# Altium PCB CH32V103R-R0-1v3.PcbDoc
Units mil, origin at the board's own origin, x right, y up, seen from the top; angles counter-clockwise.
Board outline 1801.31 x 2217.7 mil, 2 copper layers (Top Layer, Bottom Layer); 39 components, 69 nets, 227 pads, 127 vias.
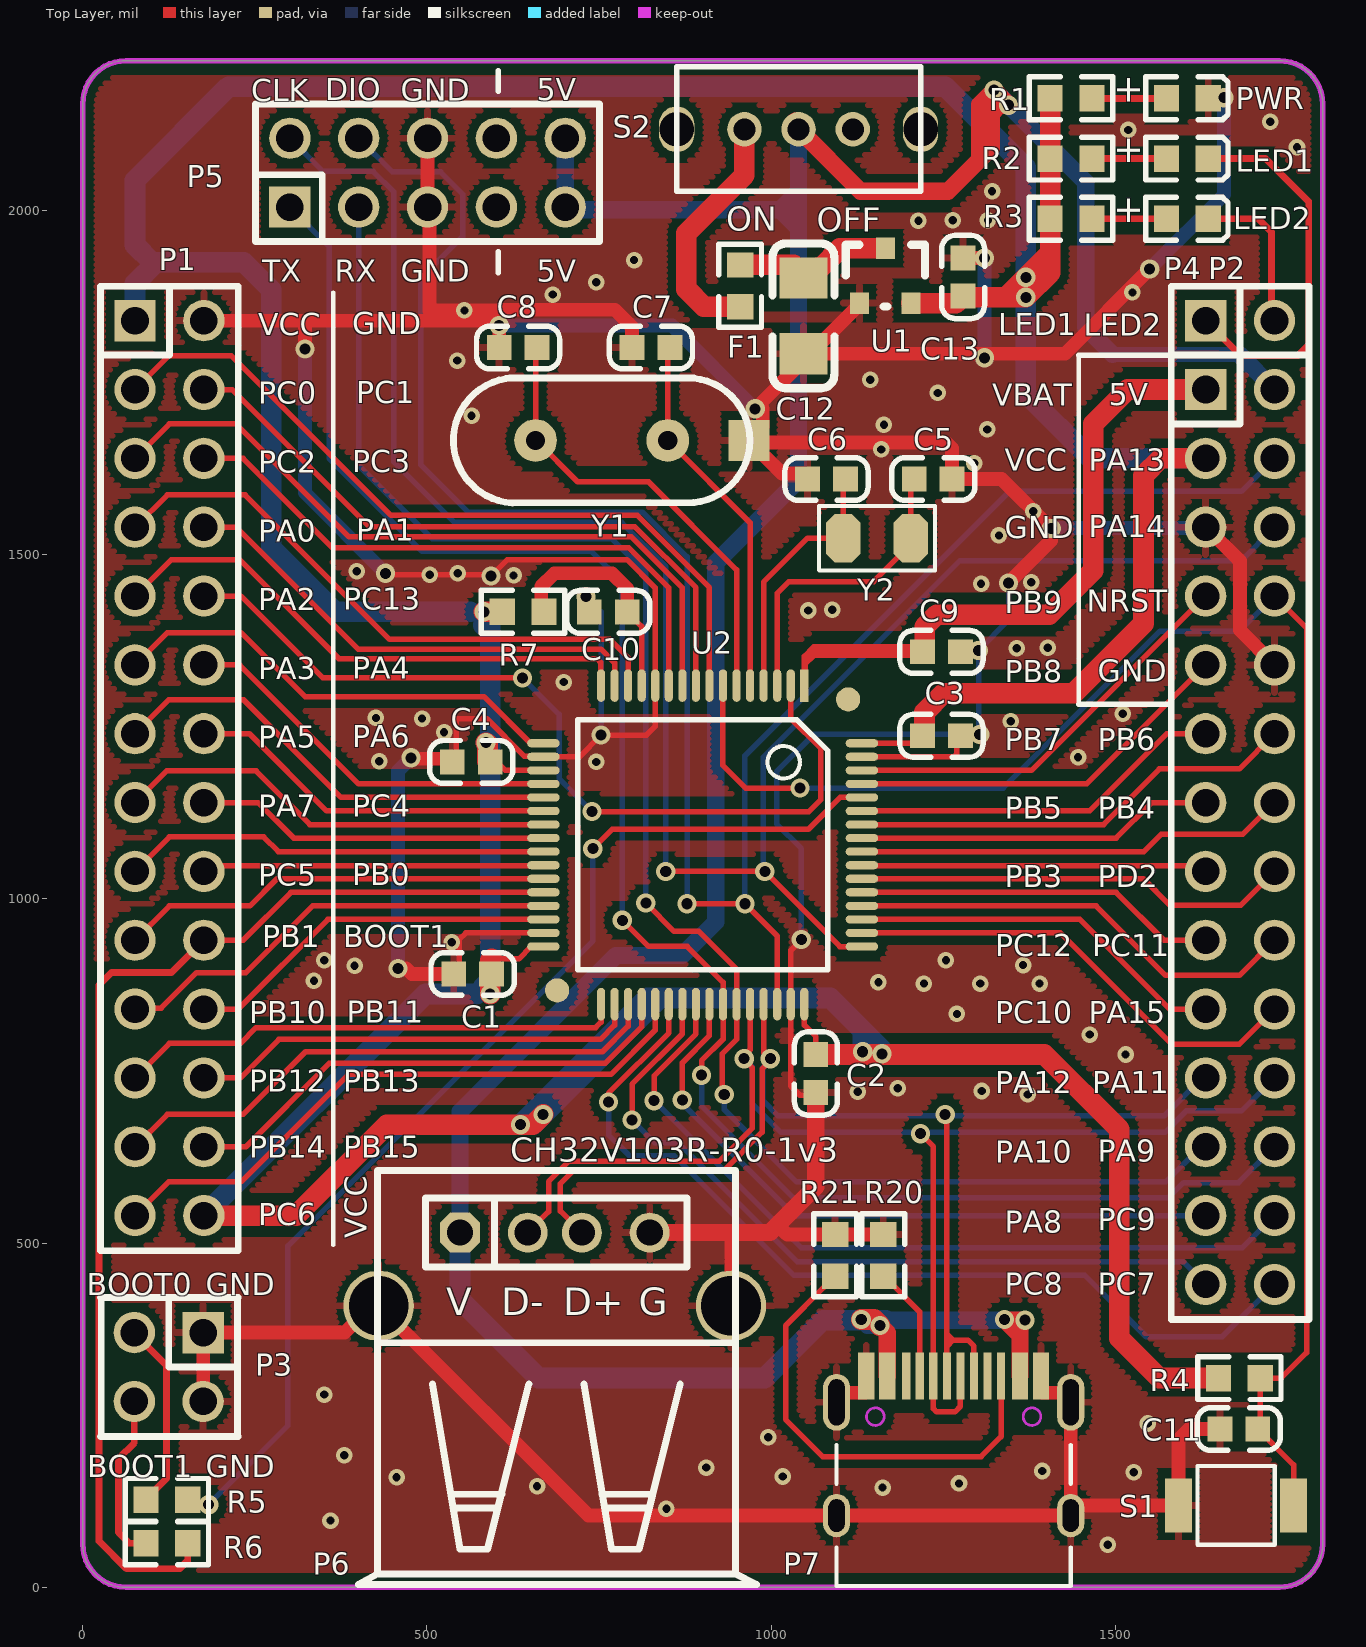
[diagram p0: Top Layer view]
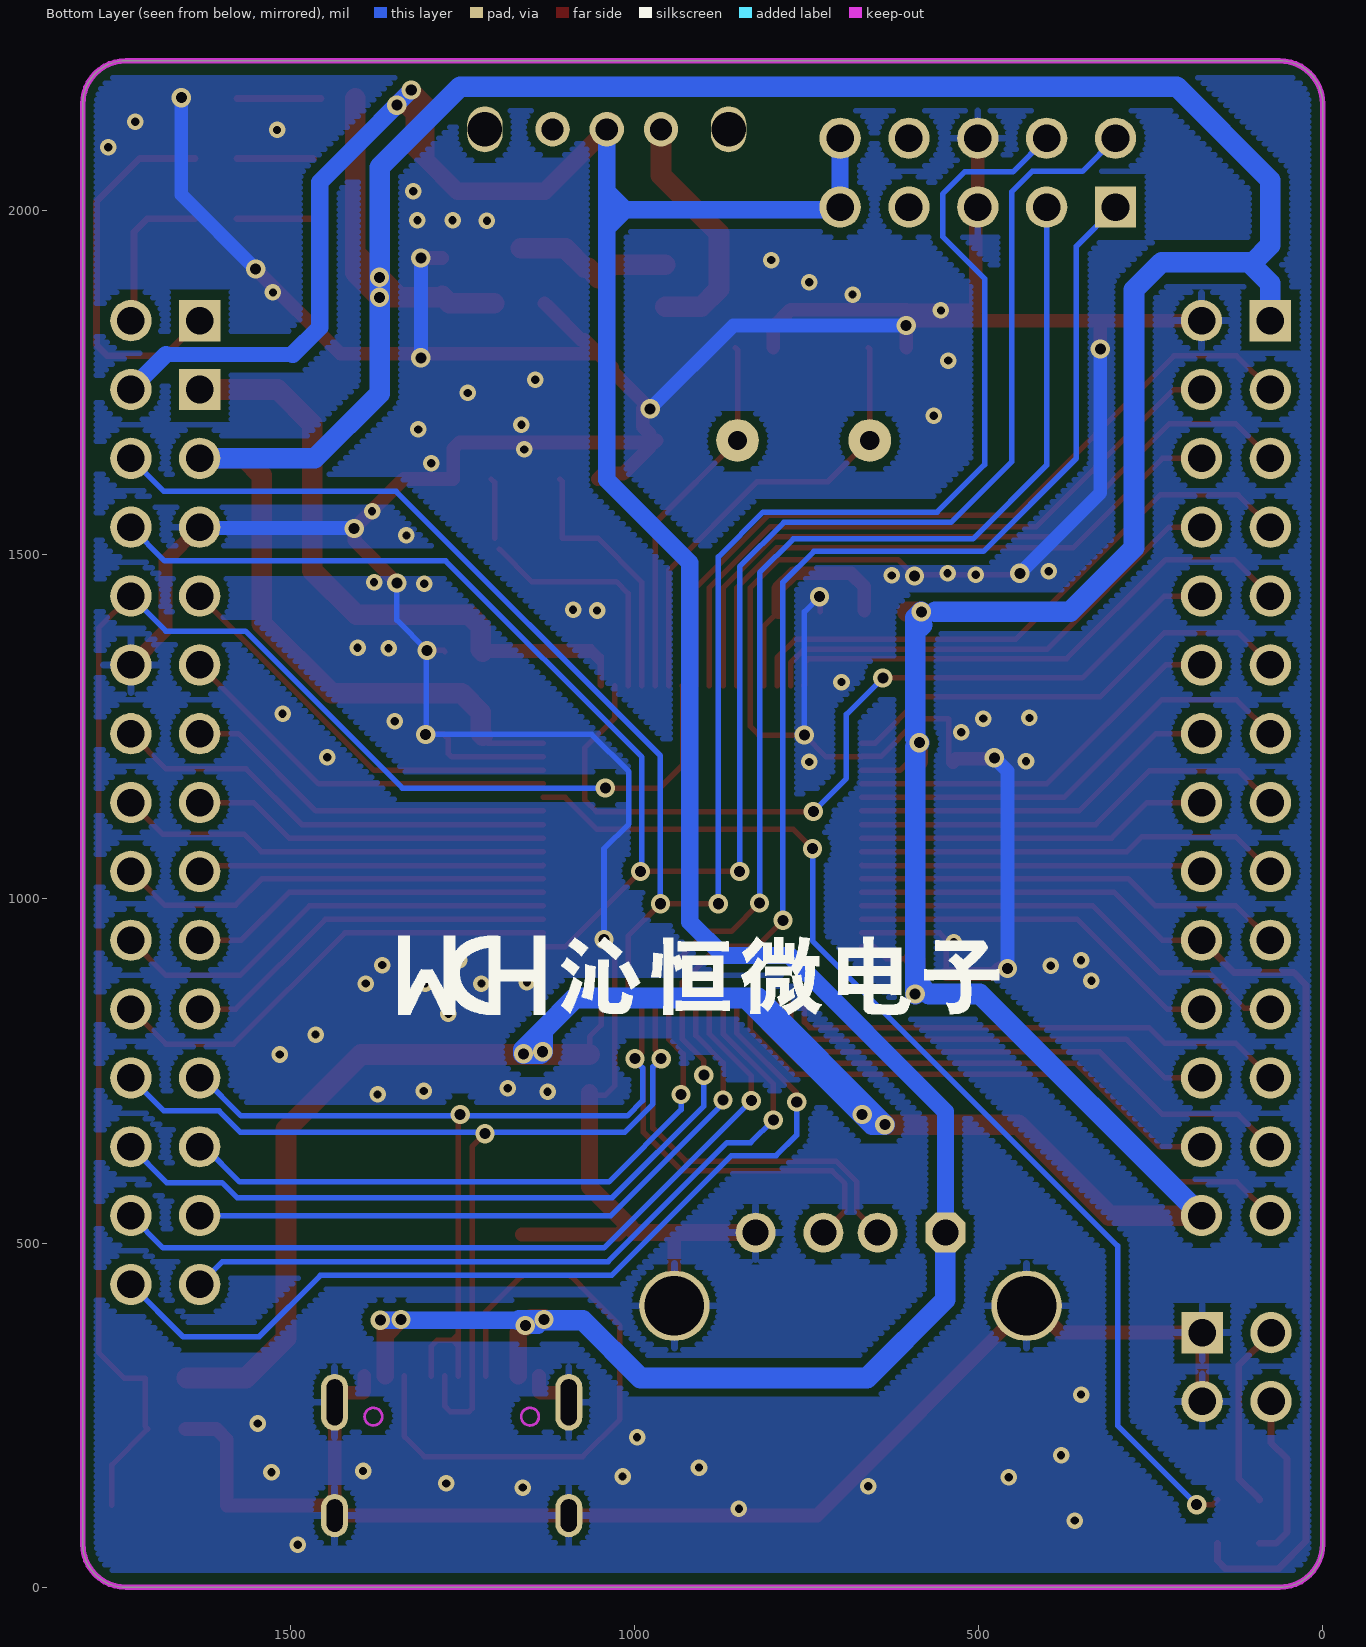
[diagram p1: Bottom Layer view, seen from below]

## Layer stack, top to bottom
Top Solder: solder mask 0.4, Solder Resist, Dk 3.5
Top Layer: signal copper 1.4
Dielectric 1: dielectric 12.6, FR-4, Dk 4.8
Bottom Layer: signal copper 1.4
Bottom Solder: solder mask 0.4, Solder Resist, Dk 3.5

## Board outline
0,62.99 0,2154.71 cw(c62.99,2154.71) 62.99,2217.7 1738.32,2217.7 cw(c1738.32,2154.71) 1801.31,2154.71 1801.31,62.99 cw(c1738.32,62.99) 1738.32,0 62.99,0 cw(c62.99,62.99)

## Design rules (kind name [scope] priority, off if disabled: settings)
Clearance Clearance_1 [InPolygon] p1: gap=12 ignorepadtopadclearanceinfootprint=FALSE
Clearance [All] p2: gap=6 ignorepadtopadclearanceinfootprint=FALSE
ComponentClearance [All] p1 off: gap=10 collisioncheckmode=3 verticalgap=10 showdistances=FALSE
MinimumSolderMaskSliver [All] p1 off: minsoldermaskwidth=10
PolygonConnect PolygonConnect_1 [IsVia] p1: connectstyle=Direct reliefconductorwidth=10 reliefentries=4 polygonreliefangle="90 Angle" airgapwidth=10
PolygonConnect [All] p2: connectstyle=Relief reliefconductorwidth=10 reliefentries=4 polygonreliefangle="90 Angle" airgapwidth=10
RoutingVias [All] p1: holewidth=28 width=50 viastyle="Through Hole" minholewidth=12 minwidth=24 maxholewidth=16 maxwidth=28
SilkToSilkClearance [All] p1 off: silktosilkclearance=10
SilkToSolderMaskClearance [IsPad] p1 off: minsilkscreentomaskgap=10 clearancetoexposedcopper=TRUE
SolderMaskExpansion [All] p1: expansion=4 istentingtop=FALSE
Width [All] p1: maxlimit=50 minlimit=8 preferedwidth=10
26 further rules are at their usual default settings.

## Components (designator, comment, footprint, x,y, rotation, side; value= is the part's Value field where it differs from the comment)
C1 "0.1uF" 0603_C 539,891 r0 top value=15pF
C2 "0.1uF" 0603_C 1065,719 r90 top value=15pF
C3 "0.1uF" 0603_C 1274.98,1237 r180 top value=15pF
C4 "0.1uF" 0603_C 537,1199 r0 top value=15pF
C5 "12pF" 0603_C 1208,1610 r0 top
C6 "12pF" 0603_C 1108,1610 r180 top
C7 "22pF" 0603_C 798,1801 r0 top
C8 "22pF" 0603_C 605,1801 r0 top
C9 "0.1uF" 0603_C 1220,1359 r0 top value=15pF
C10 "0.1uF" 0603_C 791,1417 r180 top value=15pF
C11 "0.1uF" 0603_C 1652,230 r0 top
C12 "10uF" 3216_C 1047,1902 r90 top
C13 "2.2uF" 0603_C 1279,1876 r90 top
F1 "500mA" 0603 955,1860.37 r90 top
LED1 "LED1   blue" 0603+ 1574.37,2075.5 r0 top
LED2 "LED2  blue" 0603+ 1574.37,1988 r0 top
P1 "HEADER 14x2" IDC28-2.54mm 76,1840 r0 top
P2 "HEADER 14x2" IDC28-2.54mm 1631.31,1740 r0 top
P3 "Header 2X2" IDC4-2.54mm 175,370 r270 top
P4 "2HEAD" SIP2-2.54mm 1631.31,1840 r90 top
P5 "HEADER 5x2" IDC10-2.54mm 701,2005 r90 top
P6 "USB_A" USBAF 548.11,515.3 r0 top
P7 "TYPE-C" TYPE-C-Receptacle-2.0 1265.21,306.99 r0 top
PWR "POWER  red" 0603+ 1574.37,2163 r0 top
R1 "1K" 0603 1466,2163 r180 top
R2 "1K" 0603 1405.37,2075.5 r0 top
R3 "1K" 0603 1405.37,1988 r0 top
R4 "10K" 0603 1710.63,304 r180 top
R5 "10K" 0603 152.63,127 r180 top
R6 "10K" 0603 152.63,64 r180 top
R7 "0Ω" 0603 609.37,1417 r0 top value=10K
R20 "NC(5.1K)" 0603 1163,452 r90 top
R21 "NC(5.1K)" 0603 1093,452 r90 top
S1 "KEY" 贴片按键 1759,119 r180 top
S2 "SW" KEY2 1197.48,2118 r180 top
U1 "6219P33M" SOT-23 1128.6,1865.47 r0 top
U2 "CH32V103R" LQFP64M_10X10 1048.29,1309.91 r180 top
Y1 "8M" XT_AT49 657.87,1666 r270 top
Y2 "32.768k" FC-135 1203,1524 r180 top

## Footprints (in the part's own frame and the unit in brackets; to place one, negate y for a bottom-side part, rotate by r counter-clockwise, add the part's x,y. Pads: shape width x height; smd on the part's side, far side on the other; paste and mask are expansions set on the pad)
0603 [mm]
  rect 0.93x0.98 smd: 1(0,0) 2(1.54,0)
  silkscreen extent -0.76,-0.79 2.3,0.79
0603+ [mm]
  rect 0.93x0.98 smd: 1(0,0) 2(1.54,0)
  silkscreen extent -0.76,-0.79 2.27,0.79
0603_C [mil]
  rect 36x36 smd: 1(0,0) 2(55,0)
  silkscreen extent -33,-31 88,31
3216_C [mil]
  rect 60x70 smd: 1(0,0) 2(-110,0)
  silkscreen extent -160,-45 50,45
FC-135 [mil]
  oct 50x70 smd: 1(0,0) 2(98.43,0)
  silkscreen extent -35,-47 133,47
IDC4-2.54mm [mil]
  rect 60x60 hole 40: 1(0,0)
  round 60 hole 40: 2(100,0) 3(0,-100) 4(100,-100)
  silkscreen extent -51,-149 151,51
IDC10-2.54mm [mil]
  rect 60x60 hole 40: 1(0,400)
  round 60 hole 40: 2(100,400) 3(0,300) 4(100,300) 5(0,200) 6(100,200) 7(0,100) 8(100,100) 9(0,0) 10(100,0)
  silkscreen extent -50,-50 150,450
IDC28-2.54mm [mil]
  rect 60x60 hole 40: 1(0,0)
  round 60 hole 40: 2(100,0) 3(0,-100) 4(100,-100) 5(0,-200) 6(100,-200) 7(0,-300) 8(100,-300) 9(0,-400) 10(100,-400) 11(0,-500) 12(100,-500) 13(0,-600) 14(100,-600) 15(0,-700) 16(100,-700) 17(0,-800) 18(100,-800) 19(0,-900) 20(100,-900) 21(0,-1000) 22(100,-1000) 23(0,-1100) 24(100,-1100) 25(0,-1200) 26(100,-1200) 27(0,-1300) 28(100,-1300)
  silkscreen extent -50,-1351 150,50
KEY2 [mm]
  oval 1.3x1.7 hole 1.27: 0(-0.5,0) 0(8.5,0)
  round 1.27 hole 0.813: 1(4,0) 2(2,0) 3(6,0)
  silkscreen extent -0.51,-2.31 8.5,2.29
LQFP64M_10X10 [mm]
  round 0.889 smd: 0(-1.619,0.508) 0(9.119,11.246)
  rect 0.3x1.2 smd: 1(0,0)
  oval 0.3x1.2 smd: 2(0.5,0) 3(1,0) 4(1.5,0) 5(2,0) 6(2.5,0) 7(3,0) 8(3.5,0) 9(4,0) 10(4.5,0) 11(5,0) 12(5.5,0) 13(6,0) 14(6.5,0) 15(7,0) 16(7.5,0) 33(7.5,11.754) 34(7,11.754) 35(6.5,11.754) 36(6,11.754) 37(5.5,11.754) 38(5,11.754) 39(4.5,11.754) 40(4,11.754) 41(3.5,11.754) 42(3,11.754) 43(2.5,11.754) 44(2,11.754) 45(1.5,11.754) 46(1,11.754) 47(0.5,11.754) 48(0,11.754)
  oval 1.2x0.3 smd: 17(9.627,2.127) 18(9.627,2.627) 19(9.627,3.127) 20(9.627,3.627) 21(9.627,4.127) 22(9.627,4.627) 23(9.627,5.127) 24(9.627,5.627) 25(9.627,6.127) 26(9.627,6.627) 27(9.627,7.127) 28(9.627,7.627) 29(9.627,8.127) 30(9.627,8.627) 31(9.627,9.127) 32(9.627,9.627) 49(-2.127,9.627) 50(-2.127,9.127) 51(-2.127,8.627) 52(-2.127,8.127) 53(-2.127,7.627) 54(-2.127,7.127) 55(-2.127,6.627) 56(-2.127,6.127) 57(-2.127,5.627) 58(-2.127,5.127) 59(-2.127,4.627) 60(-2.127,4.127) 61(-2.127,3.627) 62(-2.127,3.127) 63(-2.127,2.627) 64(-2.127,2.127)
  silkscreen extent -0.86,1.26 8.37,10.49
SIP2-2.54mm [mil]
  rect 60x60 hole 40: 1(0,0)
  round 60 hole 40: 2(0,-100)
  silkscreen extent -50,-150 50,50
SOT-23 [mm]
  rect 0.7x0.8 smd: 1(0,0) 2(1.9,0) 3(0.95,2.02)
  silkscreen extent -0.51,-0.13 2.41,2.16
TYPE-C-Receptacle-2.0 [mm]
  oval 1x1.6 hole 0.6 slot 1.2 at 90 deg: 0(-4.32,-5.15) 0(4.32,-5.15)
  oval 1x2.1 hole 0.6 slot 1.7 at 90 deg: 0(-4.32,-0.97) 0(4.32,-0.97)
  rect 0.6x1.75 smd: A1(-3.225,0) A4(-2.45,0) B1(3.225,0) B4(2.45,0)
  rect 0.3x1.75 smd: A5(-1.25,0) A6(-0.25,0) A7(0.25,0) A8(1.25,0) B5(1.75,0) B6(0.75,0) B7(-0.75,0) B8(-1.75,0)
  Keep-Out Layer circle w0.1: c2.89,-1.5 r0.325
  Keep-Out Layer circle w0.1: c-2.89,-1.5 r0.325
  silkscreen extent -4.32,-7.75 4.32,-2.55
USBAF [mm]
  round 2.6 hole 2.2: 0(-3,-2.7) 0(10,-2.7)
  oct 1.473x1.473 hole 0.965: 1(0,0)
  round 1.473 hole 0.965: 2(2.5,0) 3(4.5,0) 4(7,0)
  silkscreen extent -3.75,-12.99 10.95,2.29
XT_AT49 [mil]
  rect 60x60 smd: 0(0,310)
  round 62 hole 28: 1(0,0) 2(0,192.13)
  silkscreen extent -91,-119 91,311
贴片按键 [mm]
  rect 1x2 smd: 1(0,0) 3(4.242,0)
  silkscreen extent 0.69,-1.45 3.55,1.45

## Part data
C1 C2 C3 C4 C5 C6 C7 C8 C9 C10 C11: library part Cap, "Capacitor", LatestRevisionDate=17-Jul-2002, LatestRevisionNote="Re-released for DXP Platform.", PackageReference=RAD-0.3, Published=8-Jun-2000, Publisher="Altium Limited"
C12 C13: library part CAP, "Capacitor"
F1: library part FUSE1, "Fuse"
LED1 LED2 PWR: library part LED0, "Typical INFRARED GaAs LED", LatestRevisionDate=08-Jul-2005, LatestRevisionNote="Mech Layer 1 removed.", PackageReference=LED-0, Published=8-Jun-2000, Publisher="Altium Limited"
P1 P2: "Header, 14-Pin, Dual row"
P3: "Header, 2-Pin, Dual row", LatestRevisionDate=17-Jul-2002, LatestRevisionNote="Re-released for DXP Platform.", Publisher="Altium Limited"
P5: "Header, 4-Pin, Dual row"
P6: library part USB, "USB Port"
P7: library part TYPE-C1
R1 R2 R3: library part "Res Semi", "Semiconductor Resistor", LatestRevisionDate=17-Jul-2002, LatestRevisionNote="Re-released for DXP Platform.", PackageReference=AXIAL-0.5, Published=8-Jun-2000, Publisher="Altium Limited"
R4 R5 R6 R7 R20 R21: library part Res2, "Resistor"
  R4 R5 R6 R7: LatestRevisionDate=17-Jul-2002, LatestRevisionNote="Re-released for DXP Platform.", PackageReference=AXIAL-0.4, Published=8-Jun-2000, Publisher="Altium Limited"
U2: "RISC-V MCU with USB device & USB host & ADC & Touch Key"
Y1 Y2: library part XTAL, "Crystal Oscillator", LatestRevisionDate=17-Jul-2002, LatestRevisionNote="Re-released for DXP Platform.", PackageReference=R38, Published=8-Jun-2000, Publisher="Altium Limited"

## Via types
v1: diameter 24, hole 12, Top Layer to Bottom Layer, tented both sides, 73 vias
v2: diameter 28, hole 16, Top Layer to Bottom Layer, tented both sides, 54 vias

## Nets (pads, with @x,y where several pads share a name; then routed paths per layer and width w, separated by ;. In a path a pad name is that pad's centre, name@x,y a point inside that pad or via, vN(x,y) a via of type N, cw(c..) or ccw(c..) an arc to the next point about the centre after c; other vN are vias at no path point)
+5V: P2.2 P5.9 P5.10 P6.1 P7.A4 P7.B4 S2.1 | length 5073.7
  Top Layer w25: S2.1@1035.22,2129.78 S2.1@1040,2125 ; S2.1 1130,2028 1257,2028 1303,2074 ; v2(1158.21,380.21) 1168.76,369.67 P7.A4 1168.56,307.19 1168.56,360 ; v2@1324,2174.5 1344.93,2153.57 v2(1344.93,2153.07) 1344.35,2152.5 1331.91,2152.5 1320,2140.59 1320,2091 1303,2074 ; v2(1324,2175) 1303,2154 1303,2074 ; v2(1339,389) v2@1339.57,388.43 ; P7.B4 1361.67,366.33 ; v2@1363,388 1363,387.19 v2@1361.67,385.86 ; v2@1339.57,388.43 1361.67,366.33 ; v2@1339.57,388.43 1359.1,388.43 v2@1361.67,385.86 ; 1361.67,366.33 v2@1361.67,385.86
  Top Layer w30: v2(1131,389) 1149.43,389 v2(1158.21,380.21)
  Bottom Layer w22: 1496,1791 1680.31,1791
  Bottom Layer w25: P6.1 548.11,691.11 775,918 871,918 919.5,966.5 919.5,1488.5 1040,1609 1040,1974.1 ; P5.10 P5.9 705,2001 1013.1,2001 ; S2.1@1040,2121.56 S2.1 1040,2027.9 ; v2(1324,2175) 1367.5,2131.5 1367.5,2130.5 ; v2(1344.93,2153.07) 1367.5,2130.5 ; v2(1369,388) v2@1166.81,388 ; 1496,1791 1457,1830 1457,2041 1367.5,2130.5 ; 1680.31,1791 P2.2 ; 1013.1,2001 1040,1974.1 ; 1013.1,2001 1040,2001 ; 1013.1,2001 1040,2027.9 ; 1040,1974.1 1040,2001 ; 1040,2001 1040,2027.9 ; v2@1132.39,388.43 1166.39,388.43 v2@1166.81,388 ; v2@1132.39,388.43 1132.81,388 1140.02,380.79 1157.64,380.79 v2(1158.21,380.21) 1159.02,380.21 v2@1166.81,388 ; v2@1132.39,388.43 1131.57,388.43 v2(1131,389) 1131.81,389 v2@1132.39,388.43
  Bottom Layer w30: P6.1 548.11,417.89 662,304 991,304 1075,388 1132.81,388 v2@1166.81,388
BOOT0: R5.1 U2.60 | length 1639.3
  Top Layer w8: R5.1 159.63,120 v2(183,120) ; v2(741,1073) 769,1101 1053.99,1101 1100.41,1147.43 U2.60
  Bottom Layer w8: v2(183,120) 298,235 298,496 741,939 v2(741,1073)
BOOT1: P1.20 R6.1 U2.28 | length 1684.4
  Top Layer w8: P1.20 233,940 302.63,1009.63 U2.28
  Top Layer w10: R6.1 152.63,38.63 141,27 64,27 24,67 24,875 42,893 129,893 P1.20
GND: C1.1 C2.1 C3.1 C4.1 C5.2 C6.2 C7.1 C8.1 C9.2 C10.2 C11.1 C12.2 C13.2 P1.2 P2.5 P2.10 P3.1 P3.2 P5.5 P5.6 P6.0 P6.4 P7.0 P7.A1 P7.B1 PWR.2 R20.2 R21.2 S1.3 U1.1 U2.12 U2.18 U2.31 U2.47 U2.63 Y1.0 | length 10384
  Top Layer w8: v2(440,1473) 442,1471 v1(504,1471) 591,1471 v2(593,1469) 617,1493 790.5,1493 831.76,1451.74 U2.12 831.88,1309.78 831.88,1250.88 819,1238 v2(753,1238) 721.48,1206.48 U2.18 668.55,1207.21 641.79,1207.21 587,1262 543.84,1262 543,1261.16 C4.1@543,1199 ; C1.1@547,891 547,941 556.57,950.57 U2.31 ; C10.2@730,1417 730,1438 v2(731,1439) ; v2(1044,941) 1044,940.67 1028.61,925.28 U2.47 1028.61,728.39 1042,715 1061,715 C2.1 ; U2.63 1265.48,1206.48 1270,1211 1270,1232.02 C3.1 1276.98,1239 v2(1303,1239) ; C9.2 1277,1361 v2(1301,1361)
  Top Layer w20: P3.2 P3.1@175,358 ; P3.1 380.76,370 419.76,409 430,409 734.76,104.24 1095.13,104.24 1435.29,104.24 P7.0@1435.29,110.05 ; P1.2 326,1840 ; v2(323,1799) 323,1837 326,1840 ; v2(458,899) 470,899 478,891 C1.1 C1.1@547,891 ; v2(477,1205) 478.53,1203.47 532.53,1203.47 C4.1 ; P5.6 P5.5 504,2002 504,1854.94 605,1854.94 ; P5.6@501,2125 P5.6@504,2122 ; C8.1 v2(605,1833) 605,1840 326,1840 ; 605,1856 773,1856 798,1831 C7.1 ; P6.0@941.81,409 942,409.19 942,515.3 ; Y1.0 970.87,1663 Y1.0@977.44,1663 ; v2@987.87,1712 987.87,1686 977.44,1675.56 Y1.0@977.44,1663 ; 987.87,1722.87 1032,1767 1032,1772 1052,1792 C12.2@1057,1792 ; 1009.5,526.5 1023.37,512.63 R21.2 R20.2 ; C6.2 1045,1618 1015.87,1618 977.44,1656.44 Y1.0@977.44,1663 ; P7.0@1095.13,268.8 1095.13,273.6 1104.08,282.54 1136.43,282.54 1138.24,284.35 P7.A1 ; U1.1@1130.41,1865.41 1130.41,1865.32 1124.82,1859.72 1124.72,1859.72 1077,1812 1072,1812 1057,1797 C12.2@1057,1792 ; C13.2 v2(1310.1,1931) ; v2(1345,1459) 1406.46,1520.46 1406.46,1537.46 v2(1407,1538) 1335,1610 C5.2 1263,1654.21 1254.21,1663 Y1.0@977.44,1663 ; P7.B1 1392.18,284.35 1393.99,282.54 1426.34,282.54 1435.29,273.6 1435.29,268.8 P7.0@1435.29,110.05 ; v2(1550,1915) 1427,1792 C12.2@1057,1792 ; P2.5 1632,1540 1681,1491 1681,1390.31 P2.10 ; C11.1 1607,230 1592,215 S1.3 1444.24,119 P7.0@1435.29,110.05
  Top Layer w25: P6.4 942,515.3 998.3,515.3 1009.5,526.5 1065,582 C2.1
  Bottom Layer w8: v2(731,1439) 753,1417 v2(753,1238) ; v2(1044,941) 1044,1073 1008,1109 1008,1185 1062,1239 v2(1303,1239) 1302,1240 1302,1360 v2(1301,1361) 1345,1405 v2(1345,1459)
  Bottom Layer w20: v2(323,1799) 323,1590 v2(440,1473) ; v2(458,899) 458,1186 v2(477,1205) ; v2(605,1833) 856,1833 v2(977,1712) ; P7.0@1086.19,294.16 1095.13,285.21 P7.0@1095.13,268.8 ; v2(1310,1786) 1310,1930.9 v2(1310.1,1931) ; v2(1407,1538) 1408,1539 1630.31,1539 P2.5 ; v2(1550,1915) 1658,2023 v2(1658,2164)
  other v1: 1489,62 360,97 848,114 1162,145 660,147 1273,151 456,160 1017,161 1527,167 1394,169 906,174 380,192 996,218 1547,238 351,280 1373,716 1126,720 1306,721 1184,725 1515,774 1463,803 1270,833 1222,877 1304,877 1390,877 1156,879 336,881 395,903 1366,904 351,911 1254,911 536,937 746,1199 431,1200 1446,1206 525,1242 1348,1258 493,1262 426,1263 1511,1269 699,1315 1357,1364 1402,1365 1054,1419 1089,1420 1305,1458 1378,1460 626,1470 545,1473 398,1476 1331,1528 1381,1563 1295,1633 1160,1653 1314,1682 1164,1689 565,1702 1242,1735 1144,1754 544,1782 554.5,1854.94 683,1878 1525,1881 746,1896 801,1928 1214,1985 1264,1986 1315,1986 1321,2028 1764,2092 1519,2117 1725,2129
LED1: LED1.2 P4.1 | length 554.3
  Top Layer w10: P4.1 1682.31,1789 1765,1789 1781,1805 1781,2013 1718.5,2075.5 LED1.2@1638,2075.5
LED2: LED2.2 P4.2 | length 227.7
  Top Layer w10: LED2.2@1638,1988 1708,1988 1727,1969 1727,1844.31 P4.2
NetC12_1: C12.1 F1.2 U1.3 | length 235.5
  Top Layer w30: F1.2 1033,1921 1052,1902 1067,1917 1072,1917 1100,1945 U1.3@1164.78,1945
NetF1_1: F1.1 S2.3 | length 362.5
  Top Layer w30: F1.1 902.63,1860.37 877,1886 877,1967 961.26,2051.26 S2.3@961.26,2125
NetLED1_1: LED1.1 R2.2 | length 111.4
  Top Layer w10: R2.2 LED1.1@1577.37,2075.5
NetLED2_1: LED2.1 R3.2 | length 111.4
  Top Layer w10: R3.2 LED2.1@1577.37,1988
NetP3_3: P3.3 R5.2 | length 274.9
  Top Layer w10: P3.3 75,369 122,322 122,157.98 92,127.98 R5.2
NetP3_4: P3.4 R6.2 | length 246.2
  Top Layer w10: P3.4 75,210 52,187 52,80 68,64 R6.2
NetP7_A5: P7.A5 R20.1 | length 167.5
  Top Layer w8: R20.1 1163.98,452 1216,399.98 P7.A5
NetP7_B5: P7.B5 R21.1 | length 673.8
  Top Layer w8: R21.1 1092.02,452 1077.71,437.69 1077.71,436.71 1021,380 1021,244 1075,190 1305,190 1334.11,219.11 P7.B5
NetPWR_1: PWR.1 R1.1 | length 122.4
  Top Layer w10: R1.1@1455,2163 R1.1 PWR.1@1577.37,2163
NRST: C11.2 P2.8 R4.1 S1.1 U2.7 | length 2455.9
  Top Layer w8: U2.7 929.59,1309.31 929.59,1194.41 963,1161 v2(1042,1161) ; P2.8 1778,1393.31 1778,341 1741,304 R4.1 1710.63,233.63 C11.2 1759,178 S1.1
  Bottom Layer w8: v2(1042,1161) 1337,1161 1565,1389 1680.31,1389 P2.8
PA0: P1.7 U2.14 | length 874.5
  Top Layer w8: P1.7 123,1587 236,1587 446,1377 766,1377 792.39,1350.61 U2.14
PA1: P1.8 U2.15 | length 711.5
  Top Layer w8: P1.8 223,1540 400,1363 752.8,1363 772.7,1343.1 U2.15
PA2: P1.9 U2.16 | length 794.2
  Top Layer w8: P1.9 129,1493 228,1493 372,1349 747,1349 752.29,1343.71 752.29,1310.63 U2.16
PA3: P1.11 U2.17 | length 679.4
  Top Layer w8: P1.11 123,1387 230,1387 323,1294 582.7,1294 650.53,1226.16 U2.17
PA4: P1.12 U2.20 | length 564.9
  Top Layer w8: P1.12 228,1340 400.89,1167.11 U2.20
PA5: P1.13 U2.21 | length 672.2
  Top Layer w8: P1.13 125,1289 234,1289 375.57,1147.43 U2.21
PA6: P1.14 U2.22 | length 539.8
  Top Layer w8: P1.14 242,1240 354.26,1127.74 U2.22
PA7: P1.15 U2.23 | length 644.6
  Top Layer w8: P1.15 122,1186 252,1186 329.95,1108.05 U2.23
PA8: P2.25 U2.41 | length 988.3
  Top Layer w8: v2(871,708) 871,762 910.5,801.5 U2.41
  Bottom Layer w8: v2(871,708) 871,703 1034,540 P2.25
PA9: P2.24 P5.1 U2.42 | length 2674.5
  Top Layer w8: v2(784,969) 822,931 878.06,931 930.18,878.87 U2.42 930.18,796.18 899,765 v2(899,744)
  Bottom Layer w8: P5.1 358,1948 358,1640 493,1505 739,1505 784,1460 v2(784,969) ; v2(899,744) 899,699 1032,566 1577.11,566 1599.11,588 1679.31,588 P2.24
PA10: P2.23 P5.3 U2.43 | length 2506.1
  Top Layer w8: v2(818,994) 859,953 895,953 949.87,898.13 U2.43 949.87,795.87 929,775 929,719 v2(932,716)
  Bottom Layer w8: P5.3@401,2025 P5.3 401,1630 508,1523 769,1523 818,1474 v2(818,994) ; v2(932,716) 932,694 1037,589 1573.28,589 1624.28,640 P2.23
PA11: P2.22 P6.2 P7.A7 P7.B7 U2.44 | length 1977
  Top Layer w8: P6.2 677,545.76 677,589.2 706.8,619 925,619 973,667 973,754.49 962,765.49 v2@962,768 ; v2@962.11,768 962.11,773.52 969.55,780.97 U2.44 ; v2(1217,659) 1235.69,640.32 P7.B7 1235.69,259.69 1240.37,255 1267,255 1275.06,263.06 P7.A7
  Bottom Layer w8: v2(961,768) 973,756 973,702.2 1014.2,661 1572.11,661 1603.11,692 1683.31,692 P2.22
PA12: P2.21 P6.3 P7.A6 P7.B6 U2.45 | length 1836.2
  Top Layer w8: P6.3 694,546.57 694,586.4 712.6,605 930.8,605 987,661.2 987,753 v2@1000.5,766.5 ; U2.45 989.24,776.76 998,768 v2(999,768) ; v2(1253,687) 1255.37,684.63 1255.37,368 ; P7.A6 1255.37,350 ; P7.B6 1294.74,350.26 1286,359 1264.37,359 ; 1255.37,350 1255.37,359 ; 1255.37,350 1264.37,359 ; 1255.37,359 1255.37,368 ; 1255.37,359 1264.37,359 ; 1255.37,368 1264.37,359
  Bottom Layer w8: v2(999,768) 999,765.49 988,754.49 988,707 1010,685 1571.16,685 1626.16,740 P2.21
PA13: P2.4 P5.4 U2.46 | length 2961.9
  Top Layer w8: v2(878,993) v2(962,993) 1008.96,946.04 1008.96,847.19 U2.46
  Bottom Layer w8: P5.4 450,2056 520,2056 552,2024 552,1962 491,1901 491,1631 560,1562 813,1562 878,1497 v2(878,993) ; v2(962,993) 962,1208 1346,1592 1683.31,1592 P2.4
PA14: P2.6 P5.2 U2.49 | length 2853.9
  Top Layer w8: v2(847,1040) v2(991,1040) 1100.11,930.89 U2.49
  Bottom Layer w8: P5.2 349,2057 422,2057 452,2027 452,1635 540,1547 782.8,1547 847,1482.8 v2(847,1040) ; v2(991,1040) 989,1042 989,1206 1274,1491 1682.31,1491 P2.6
PA15: P2.20 U2.50 | length 687.3
  Top Layer w8: U2.50 1420.43,950.57 1582,789 1680.31,789 P2.20
PB0: P1.18 U2.26 | length 497
  Top Layer w8: P1.18 184.27,1048.27 668.55,1048.27 U2.26
PB1: P1.19 U2.27 | length 630.3
  Top Layer w8: P1.19 126,990 243,990 282.32,1029.32 U2.27
PB3: P2.15 U2.55 | length 503
  Top Layer w8: U2.55 1132.76,1048.27 1623.04,1048.27 P2.15
PB4: P2.14 U2.56 | length 628.8
  Top Layer w8: U2.56 1541.69,1068.68 1567,1094 1685.31,1094 P2.14
PB5: P2.13 U2.57 | length 520.7
  Top Layer w8: U2.57 1501.37,1088.37 1553,1140 P2.13
PB6: P2.12 U2.58 | length 653.9
  Top Layer w8: U2.58 1483.06,1108.05 1564,1189 1680.31,1189 P2.12
PB7: P2.11 U2.59 | length 545.8
  Top Layer w8: U2.59 1462.74,1127.74 1575,1240 P2.11
PB8: P2.9 U2.61 | length 570.9
  Top Layer w8: U2.61 1458.42,1167.11 P2.9
PB9: P2.7 U2.62 | length 604.2
  Top Layer w8: U2.62 1378.11,1186.8 P2.7
PB10: P1.21 U2.29 | length 655.4
  Top Layer w8: P1.21 77.46,841.46 114,841.46 165.54,893 237,893 333.95,989.95 U2.29
PB11: P1.22 U2.30 | length 547.2
  Top Layer w8: P1.22 226,840 356.26,970.26 U2.30
PB12: P1.23 U2.33 | length 736.7
  Top Layer w8: P1.23 126,790 229,790 252,813 745,813 753.02,821.02 U2.33
PB13: P1.24 U2.34 | length 658.9
  Top Layer w8: P1.24 229,740 285,796 752,796 772.7,816.7 U2.34
PB14: P1.25 U2.35 | length 820.8
  Top Layer w8: P1.25 123,687 233,687 324,778 755,778 792.27,815.27 792.27,847.04 U2.35
PB15: P1.26 U2.36 | length 741.3
  Top Layer w8: P1.26 237,640 358,761 759,761 812.07,814.07 U2.36
PC0: P1.3 U2.8 | length 1136.6
  Top Layer w8: P1.3 125,1789 216,1789 448,1557 805.69,1557 910.5,1452.19 U2.8
PC1: P1.4 U2.9 | length 976.2
  Top Layer w8: P1.4 217,1740 416,1541 801.89,1541 890.81,1452.08 U2.9
PC2: P1.5 U2.10 | length 1056.5
  Top Layer w8: P1.5 126,1690 223,1690 387,1526 797.1,1526 871.13,1451.97 U2.10
PC3: P1.6 U2.11 | length 895.3
  Top Layer w8: P1.6 233,1640 363,1510 793.3,1510 851.44,1451.85 U2.11
PC4: P1.16 U2.24 | length 514.7
  Top Layer w8: P1.16 255,1140 306.63,1088.37 U2.24
PC5: P1.17 U2.25 | length 622.8
  Top Layer w8: P1.17 126,1090 263,1090 284.32,1068.68 U2.25
PC6: P1.27 U2.37 | length 905.1
  Top Layer w8: P1.27 125,589 230,589 386,745 767.4,745 831.76,809.36 U2.37
PC7: P2.28 U2.38 | length 1346.5
  Top Layer w8: v2(764,705) 764,718 851.44,805.44 U2.38
  Bottom Layer w8: v2(764,705) 764,657 794,627 859,627 1033,453 1456,453 1545,364 1655.31,364 P2.28
PC8: P2.27 U2.39 | length 1130.7
  Top Layer w8: v2(798,679) 798,731 871.13,804.13 U2.39
  Bottom Layer w8: v2(798,679) 831,646 865,646 1038,473 1598.31,473 P2.27
PC9: P2.26 U2.40 | length 1174.8
  Top Layer w8: v2(830,707) 830,743 890.81,803.81 U2.40
  Bottom Layer w8: v2(830,707) 1044,493 1684.31,493 P2.26
PC10: P2.19 U2.51 | length 553.2
  Top Layer w8: U2.51 1448.74,970.26 1579,840 P2.19
PC11: P2.18 U2.52 | length 662.2
  Top Layer w8: U2.52 1472.06,989.95 1573,889 1680.31,889 P2.18
PC12: P2.17 U2.53 | length 528.1
  Top Layer w8: U2.53 1501.37,1009.63 1571,940 P2.17
PC13: P1.10 U2.2 | length 1271
  Top Layer w8: P1.10 230,1440 349,1321 v2(639,1321) ; v2(740,1127) 1055,1127 1072,1144 1072,1219 1028.61,1262.39 U2.2
  Bottom Layer w8: v2(639,1321) 692,1268 692,1175 v2(740,1127)
PC14: C5.1 U2.3 Y2.1 | length 435.7
  Top Layer w8: U2.3 1008.92,1443.92 1026,1461 1149,1461 Y2.1@1196,1508 ; Y2.1 1203,1605 C5.1
PC15: C6.1 U2.4 Y2.2 | length 379.5
  Top Layer w8: U2.4 989.24,1460.24 1053,1524 Y2.2 1104.57,1606.57 C6.1
PD0: C7.2 U2.5 Y1.2 | length 541.9
  Top Layer w8: C7.2 850,1798 Y1.2 969.55,1546.45 U2.5
PD1: C8.2 U2.6 Y1.1 | length 673.9
  Top Layer w8: C8.2 657.87,1798.87 Y1.1 659,1666 719,1606 822,1606 949.87,1478.13 U2.6
PD2: P2.16 U2.54 | length 635.4
  Top Layer w8: U2.54 1540.69,1029.32 1579,991 1682.31,991 P2.16
VBAT: C9.1 P2.1 U2.1 | length 1318.8
  Top Layer w8: C9.1@1217,1350 1213,1354 1062,1354 1049.53,1341.53 1049.53,1311.14 U2.1 1048.29,1348 ; 1048.29,1348 1059.29,1359 C9.1 1213,1366 1062,1366 1048.29,1352.29 1048.29,1348
  Top Layer w30: C9.1 1223,1362 1223,1395.43 1240.57,1413 1404,1413 1468,1477 1468,1690 1518,1740 P2.1
VCC: C1.2 C2.2 C3.2 C4.2 C13.1 P1.1 P1.28 P2.3 R1.2 R2.1 R3.1 R4.2 R7.1 U1.2 U2.19 U2.32 U2.48 U2.64 | length 8503.6
  Top Layer w8: 594,913 633.67,913 651.56,930.89 U2.32 ; C4.2@602,1199 614.2,1186.8 U2.19 ; U2.48 1048.29,816.71 1065,800 C2.2 ; U2.64 1213.15,1226.16 C3.2@1219.98,1233
  Top Layer w30: P1.28 310,540 442,672 v2(636,672) 654,672 v2(669,687) ; v2(583,1417) R7.1@603.37,1417 ; v2(586,1227) 588,1225 C4.2@588,1200 ; v2(592,862) 592,911 594,913 ; C2.2 1397,774 1506,665 1506,362 1564,304 R4.2 ; U1.2 1268.47,1865.47 C13.1 ; C3.2 1222.98,1240 1222.98,1270.98 1251,1299 1440,1299 1541,1400 1541,1615 1566,1640 P2.3 ; C13.1@1280,1874 1341,1874 ; 1405.37,1946.54 1405.37,1938.37 ; R1.2 R2.1 R3.1 1405.37,1983.71 1405.37,1938.37 ; 1341,1874 v2(1370,1903) 1405.37,1938.37 ; 1341,1874 v2(1370,1874) 1405.37,1909.37 1405.37,1938.37
  Bottom Layer w30: P1.1 76,1894 107,1925 ; P1.28 498,862 572,862 ; 563,1417 367,1417 274,1510 274,1885 234,1925 107,1925 ; 582,872 592,882 ; 582,1398 592,1388 ; v2(583,1417) 592,1408 592,1388 ; v2(592,862) 592,882 ; 864,856 838,856 ; P2.3 1464,1640 1370,1734 v2(1370,1874) v2(1370,1903) 1370,2063 1253,2180 212,2180 76,2044 76,1950 101,1925 107,1925 ; 592,882 592,1221 v2(586,1227) 592,1233 592,1388 ; 838,856 1086,856 1133,809 ; 838,856 820,856 v2(636,672) 654,672 v2(669,687) 838,856 ; 1133,809 1161,781 v2(1161,775) 1136,775 v2(1133,778) 1133,809
VDDA: C10.1 R7.2 U2.13 | length 326.8
  Top Layer w8: C10.1 812.07,1395.93 U2.13
  Top Layer w20: R7.2@666,1419 666,1454 685,1473 769,1473 791,1451 C10.1
pads on no net: P5.7 P5.8 P7.A8 P7.B8 S2.0 S2.2 U2.0

## Polygon pours and split planes (outlines as drawn)
GND on Top Layer "GND_L01_P-001" (hatched Horizontal grid 8 track 8, remove dead copper, pour order 0): -2,2218 1796,2218 1796,-19 -14,-19 -14,-4
GND on Bottom Layer "GND_L01_P-001" (hatched Horizontal grid 8 track 8, remove dead copper, pour order 1): -22,2226 -22,-8 1816,-8 1816,2218

## Keep-outs
Keep-Out Layer:
  the board outline again, w8

## Silkscreen, mask and mechanical layers (free items; w line width, h text height)
Top Overlay:
  lines w6: 364.09,497.27 364.09,1881.13
  lines w7: 1447,1283.13 1447,1790
  lines w8: 603.8,1909.85 603.8,1939.85 ; 604,2173 604,2203 ; 1447,1283.13 1579,1283.13 ; 1447,1790 1581.31,1790 1581.31,1762.46
  text "DIO" at 352.67,2160.51 h32
  text "5V" at 659.69,2160.51 h32
  text "GND" at 462,2159.51 h32
  text "CLK" at 245.01,2159.01 h32
  text "ON" at 935,1970.51 h35
  text "OFF" at 1066,1969.51 h35
  text "TX" at 261,1896.51 h32
  text "RX" at 366,1896.51 h32
  text "GND" at 462,1896.51 h32
  text "5V" at 659.69,1896.51 h32
  text "GND" at 391.91,1820.01 h32
  text "VCC" at 255.37,1819.02 h32
  text "LED1" at 1330.36,1819.1 h32
  text "LED2" at 1454,1818 h32
  text "PC1" at 397.24,1720.02 h32
  text "PC0" at 255.37,1719.08 h32
  text "5V" at 1490.66,1717.19 h32
  text "VBAT" at 1321.24,1716.2 h32
  text "VCC" at 1339.23,1621.71 h32
  text "PA13" at 1461.34,1621.71 h32
  text "PC3" at 391.91,1620.04 h32
  text "PC2" at 255.37,1619.14 h32
  text "PA14" at 1461.34,1525.26 h32
  text "GND" at 1339.23,1524.27 h32
  text "PA1" at 397.24,1520.06 h32
  text "PA0" at 255.37,1519.2 h32
  text "PC13" at 378.58,1420.07 h32
  text "PA2" at 255.37,1419.27 h32
  text "NRST" at 1458.67,1416.99 h32
  text "PB9" at 1339.23,1415.02 h32
  text "PA4" at 391.91,1320.09 h32
  text "PA3" at 255.37,1319.33 h32
  text "GND" at 1474.67,1315.61 h32
  text "PB8" at 1339.23,1314.63 h32
  text "PA6" at 391.91,1220.11 h32
  text "PA5" at 255.37,1219.39 h32
  text "PB7" at 1339.23,1216.17 h32
  text "PB6" at 1474.67,1216.17 h32
  text "PA7" at 255.37,1119.45 h32
  text "PC4" at 391.91,1119.45 h32
  text "PB5" at 1339.23,1116.52 h32
  text "PB4" at 1474.67,1116.52 h32
  text "PC5" at 255.37,1019.51 h32
  text "PB0" at 391.91,1020.14 h32
  text "PB3" at 1339.23,1016.86 h32
  text "PD2" at 1474.67,1016.86 h32
  text "PB1" at 260.7,929.57 h32
  text "BOOT1" at 378.34,930.16 h32
  text "PC12" at 1325.9,917.02 h32
  text "PC11" at 1466.67,917.02 h32
  text "PB10" at 242.04,819.63 h32
  text "PB11" at 383.91,820.17 h32
  text "PC10" at 1325.9,819.55 h32
  text "PA15" at 1461.34,819.55 h32
  text "PB12" at 242.04,719.69 h32
  text "PB13" at 378.58,720.19 h32
  text "PA12" at 1325.9,717.89 h32
  text "PA11" at 1466.67,717.89 h32
  text "PB14" at 242.04,624.2 h32
  text "PB15" at 378.58,624.2 h32
  text "CH32V103R-R0-1v3" at 621.41,618.51 h35
  text "PA9" at 1474.67,618.24 h32
  text "PA10" at 1325.9,616.79 h32
  text "PC6" at 255.37,525.81 h32
  text "PC9" at 1474.67,518.58 h32
  text "PA8" at 1339.23,515.41 h32
  text "VCC" at 413,507 h32 r90
  text "BOOT0" at 6,424.51 h32
  text "GND" at 179,424.51 h32
  text "PC8" at 1339.23,424.93 h32
  text "PC7" at 1474.67,424.93 h32
  text "BOOT1" at 7,159.67 h32
  text "GND" at 179,159.67 h32
Bottom Overlay:
  drawing of 3660 lines, arcs and shapes, not listed
Mechanical 1:
  the board outline again, w10

## Text inside footprints (layer, text, board x,y; h text height)
LED1: Top Overlay "+" at 1536.29,2064.51 h40 r90
LED2: Top Overlay "+" at 1536.29,1977.01 h40 r90
P6: Top Overlay "D-" at 608.11,395.3 h40; Top Overlay "D+" at 698.11,395.3 h40; Top Overlay "V" at 528.11,395.3 h40; Top Overlay "G" at 808.11,395.3 h40
PWR: Top Overlay "+" at 1536.29,2152.01 h40 r90